# Allegro board controller.brd
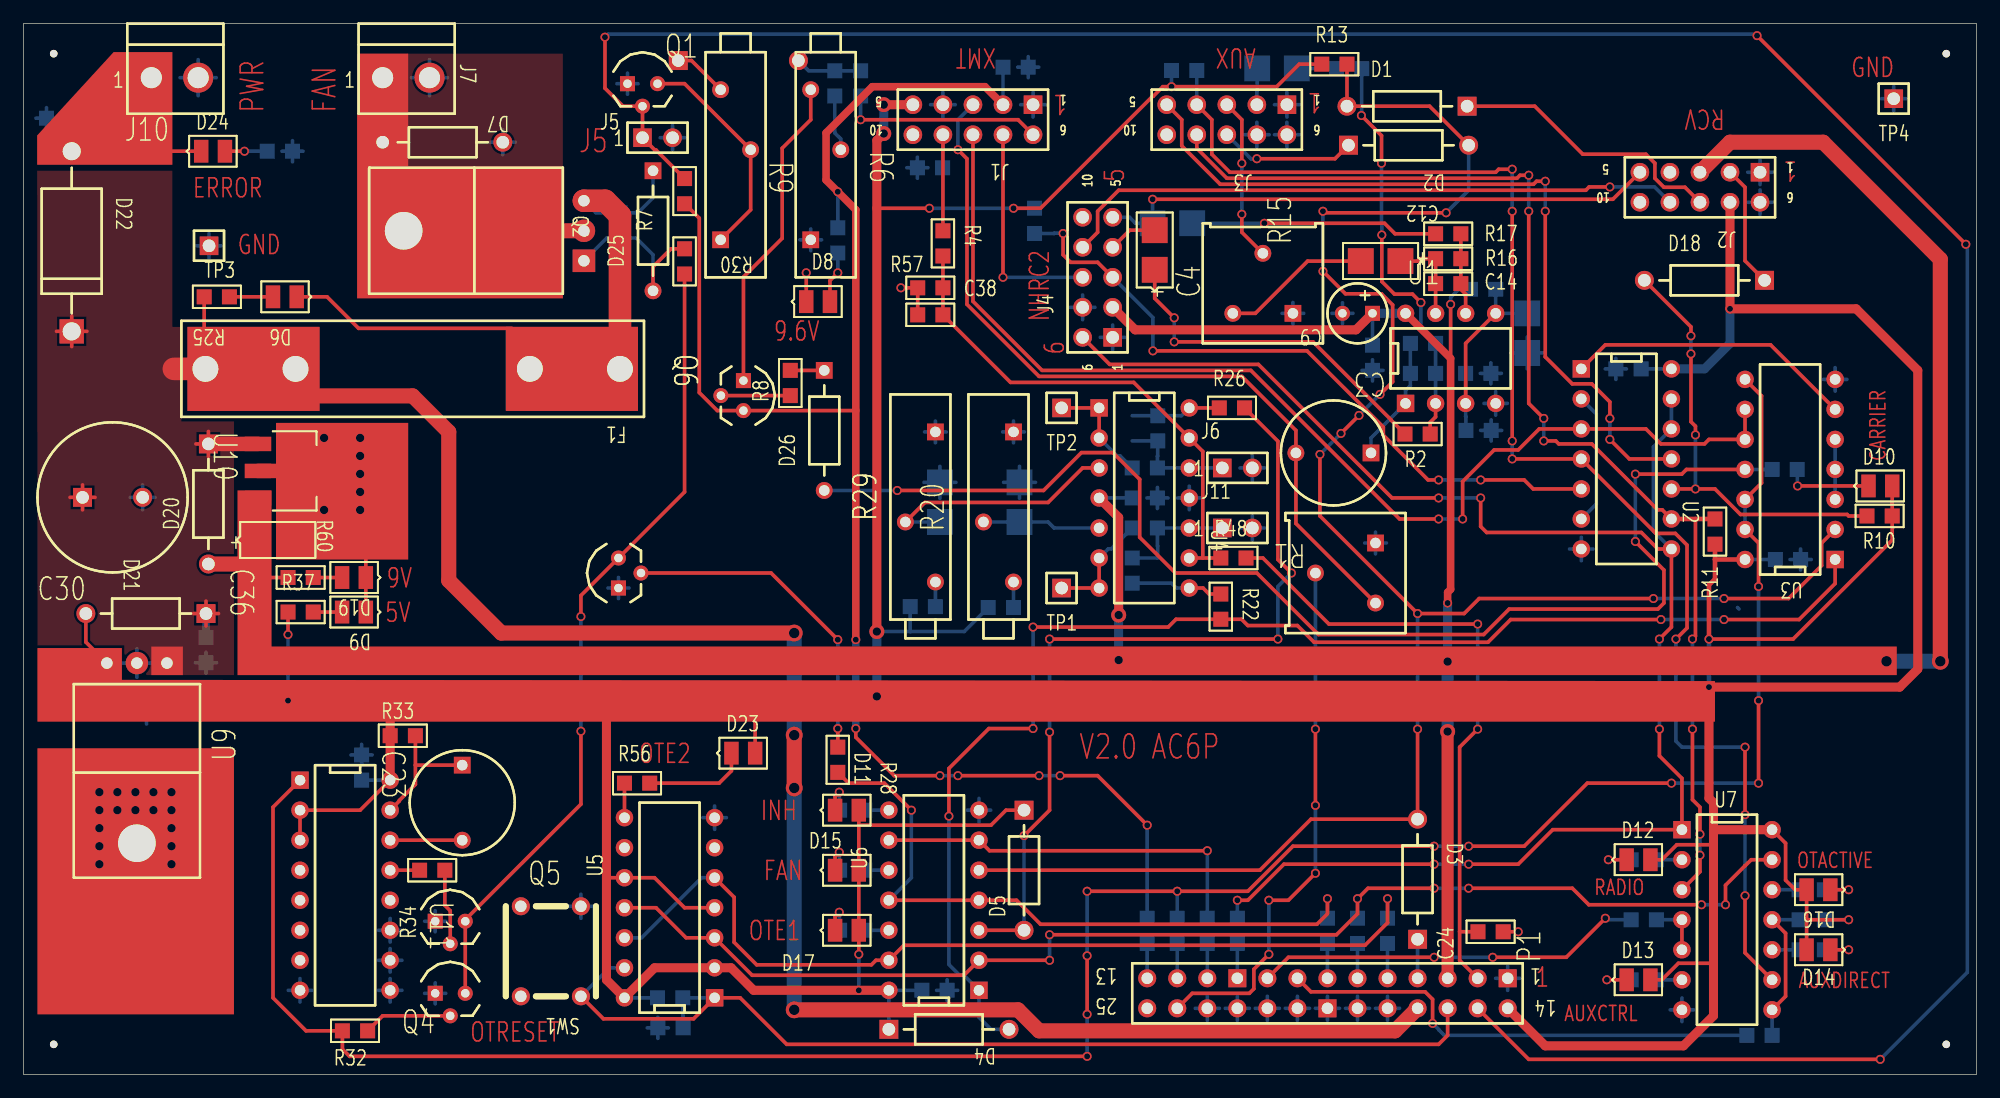
[diagram p0: board, top side]
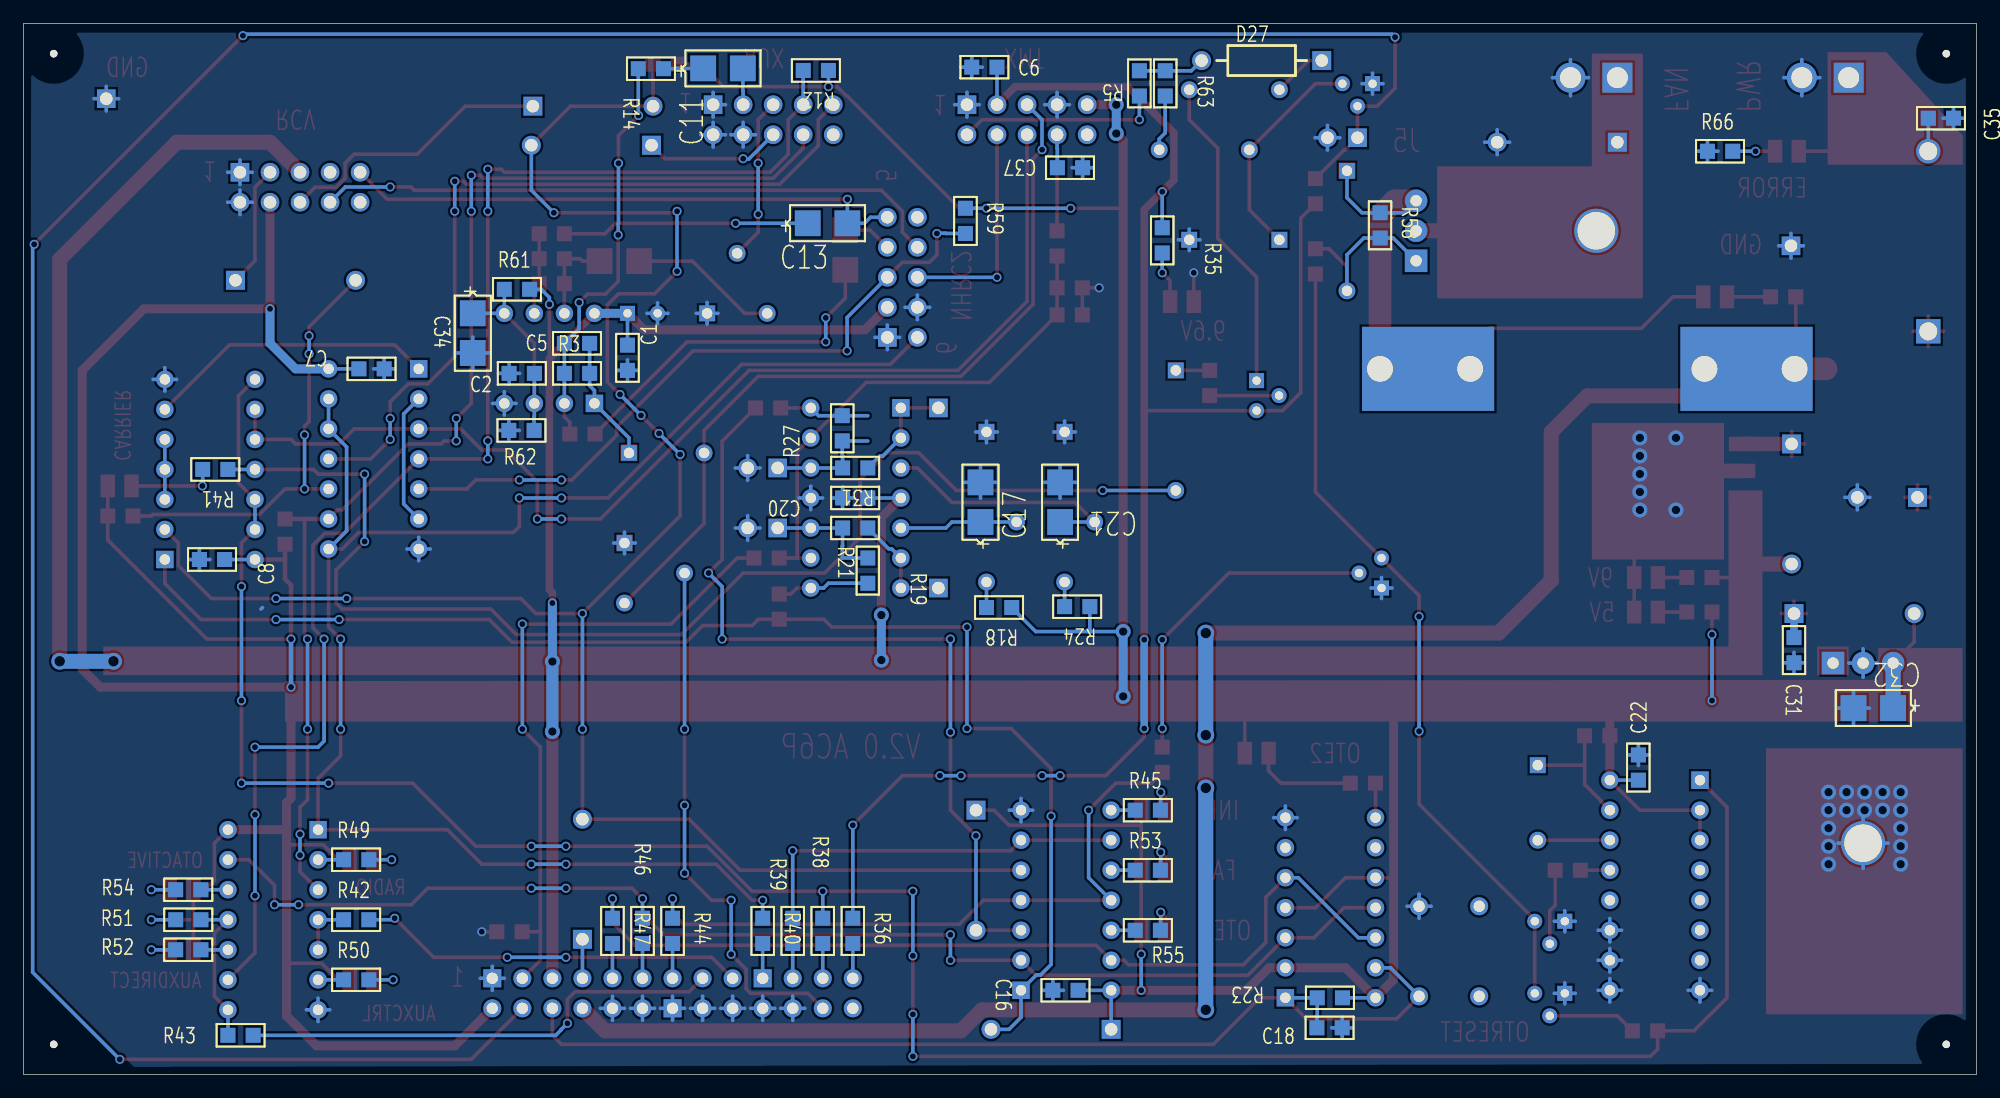
[diagram p1: board, bottom side, seen from below]

Outline 165.1 x 88.9 mm; copper layers: TOP, BOTTOM. Coordinates in mm from the lower left corner of the outline.
Outline path: 0,88.9 0,0 165.1,0 165.1,88.9 0,88.9

## Placement (name value [footprint] x y rotation side)
C1  100n  [SMC0805]  114.05 59.56 90 bottom
C2  100n  [SMC0805]  121.92 59.31 0 bottom
C3  100uF/20V Tant  [CYLD350LS250_35D]  110.74 52.58 180 top
C4  10uF/16v Tant  [EIAB_SMCT3528_12]  95.63 68.07 90 top
C5  100pF  [SMC0805]  117.25 61.85 0 bottom
C6  100n  [SMC0805]  84.94 85.22 180 bottom
C7  100n  [SMC0805]  134.62 59.69 0 bottom
C8  100n  [SMC0805]  150.24 43.56 180 bottom
C9  10uF  [C_200D_100LS_28D]  114.05 64.39 180 top
C11  10uF/16v Tant  [EIAB_SMCT3528_12]  107.65 85.12 180 bottom
C12  10uF/16v Tant  [EIAB_SMCT3528_12]  116.41 68.81 180 top
C13  10uF/16v Tant  [EIAB_SMCT3528_12]  98.81 72.01 180 bottom
C14  100pF  [SMC0805]  119.38 66.9 0 top
C16  100n  [SMC0805]  75.95 7.11 0 bottom
C17  1uF  [EIAB_SMCT3528_12]  84.2 46.74 90 bottom
C18  100n  [SMC0805]  55.75 3.94 180 bottom
C20  100n  [SMC0805]  93.73 48.77 0 bottom
C21  1uF  [EIAB_SMCT3528_12]  77.47 46.74 90 bottom
C22  100n  [SMC0805]  28.57 24.89 90 bottom
C23  100uF  [CYLD350LS250_35D]  37.08 22.99 270 top
C24  100n  [SMC0805]  125.09 12.06 180 top
C30  1000uF/35V  [CYLD500LS200_42D]  4.98 48.82 0 top
C31  470n  [SMC0805]  15.42 36.96 270 bottom
C32  1uF  [EIAB_SMCT3528_12]  7.04 30.99 0 bottom
C34  1.0uF  [EIAB_SMCT3528_12]  127.13 64.39 270 bottom
C35  100n  [SMC0805]  4.06 80.9 180 bottom
C36  22uF/Tant  [EIAB_SMCT3528_12]  19.81 45.21 0 top
C37  10p  [SMC0805]  75.56 76.71 0 bottom
C38  10nF  [SMC0805]  75.59 66.55 0 top
D1  1N5818  [DAX400_42D]  111.89 81.92 0 top
D2  1N5818  [DAX400_42D]  122.17 78.61 180 top
D3  1N5818  [DAX400_42D]  117.86 21.59 270 top
D4  1N5818  [DAX400_42D]  83.31 3.81 180 top
D5  1N5818  [DAX400_42D]  84.58 12.19 90 top
D6  RED  [SMD_0805_21]  21.08 65.79 180 top
D7  1N4002  [DAX400_42D]  40.51 78.87 180 top
D8  GRN  [SMD_0805_21]  68.17 65.38 0 top
D9  GRN  [SMD_0805_21]  26.92 39.12 180 top
D10  RED  [SMD_0805_21]  157.99 49.78 0 top
D11  BLU  [SMD_0805_21]  70.61 22.35 0 top
D12  YEL  [SMD_0805_21]  137.54 18.16 0 top
D13  YEL  [SMD_0805_21]  137.54 8 0 top
D14  YEL  [SMD_0805_21]  150.75 10.54 180 top
D15  GRN  [SMD_0805_21]  70.61 17.27 0 top
D16  RED  [SMD_0805_21]  150.75 15.62 180 top
D17  BLU  [SMD_0805_21]  70.61 12.19 0 top
D18  1N5818  [DAX400_42D]  137.03 67.18 0 top
D19  GRN  [SMD_0805_21]  26.92 42.04 180 top
D20  1N5818  [DAX400_42D]  15.62 43.18 90 top
D21  1N5818  [DAX400_42D]  5.26 38.99 0 top
D22  SB1245  [DAX600_60D]  4.06 78.11 270 top
D23  BLU  [SMD_0805_21]  61.85 27.18 0 top
D24  RED  [SMD_0805_21]  17.02 78.11 0 top
D25  1N5240B  [DAX400_35D]  53.21 66.29 90 top
D26  1N5243B  [DAX400_35D]  67.69 49.4 90 top
D27  1N5818  [DAX400_42D]  65.51 85.78 180 bottom
F1  2.5A Fast AGC Glass  [3AG_250_1250]  50.42 59.69 180 top
J1  1O-pin ribbon to DB9 female  [BCON2DB9_5X2V_100S_42D]  85.34 82.04 180 top
J2  1O-pin ribbon to DB9 female  [BCON2DB9_5X2V_100S_42D]  146.81 76.33 180 top
J3  1O-pin ribbon to DB9 female  [BCON2DB9_5X2V_100S_42D]  106.81 82.04 180 top
J4  1O-pin ribbon to DB9 male  [BCON2DB9_5X2V_100S_42D]  92.08 62.36 90 top
J5  2Pin Header  [BCON_2X1V_100S_1SQ_42D]  52.32 79.25 0 top
J6  2Pin Header  [BCON_2X1V_100S_1SQ_42D]  101.35 51.31 0 top
J7  0.156 VH  [BLKCON156_VHTM1SQ_SW156_2]  30.35 84.33 0 top
J10  0.156 VH  [BLKCON156_VHTM1SQ_SW156_2]  10.79 84.33 0 top
J11  2Pin Header  [BCON_2X1V_100S_1SQ_42D]  101.35 46.23 0 top
NOREF  -  [unnamed]  162.56 86.36 0 top
NOREF#2  -  [unnamed]  162.56 2.54 0 top
NOREF#3  -  [unnamed]  2.54 86.36 0 top
NOREF#4  -  [unnamed]  2.54 2.54 0 top
P1  26 Ribbon to DB25  [BCON2DB25_13X2V_100SW_1SQ_42D]  125.48 8.13 180 top
Q1  2N2222  [TO92R100]  52.32 83.82 0 top
Q2  IRF9Z34  [TO220_H1234]  47.37 68.83 0 top
Q3  2N2222  [TO92R100]  50.29 42.42 90 top
Q4  2N2222  [TO92R100]  36.07 6.86 0 top
Q5  2N2222  [TO92R100]  36.07 12.95 0 top
Q6  2N2907  [TO92R100]  60.86 57.43 270 top
R1  100k  [VRES18_35D]  111.76 42.42 270 top
R2  51k  [SMR0805]  116.79 54.18 0 top
R3  51k  [SMR0805]  119.38 59.31 180 bottom
R4  47k  [SMR0805]  77.72 71.37 270 top
R5  11k  [SMR0805]  70.76 82.78 90 bottom
R6  10k/10t  [VRES9_35D]  66.55 70.61 270 top
R7  9.1k  [SMR0805]  55.88 73.66 90 top
R8  1k  [SMR0805]  64.82 57.43 90 top
R9  10k/10t  [VRES9_35D]  58.93 70.61 270 top
R10  4.7k  [SMR0805]  157.99 47.24 180 top
R11  47k  [SMR0805]  143 44.86 90 top
R12  47k  [SMR0805]  97.05 84.94 0 bottom
R13  47k  [SMR0805]  109.75 85.47 0 top
R14  51k  [SMR0805]  111 85.09 0 bottom
R15  10k  [VRES18_35D]  104.78 66.93 180 top
R16  51k  [SMR0805]  121.51 69.01 180 top
R17  51k  [SMR0805]  119.38 71.12 0 top
R18  39k  [SMR0805]  81.56 39.5 0 bottom
R19  1M  [SMR0805]  93.73 43.69 270 bottom
R20  10k/10t  [VRES9_35D]  83.69 54.36 90 top
R21  6.2k  [SMR0805]  93.73 46.23 0 bottom
R22  10k  [SMR0805]  101.22 40.64 270 top
R23  1M  [SMR0805]  53.59 6.48 0 bottom
R24  39k  [SMR0805]  74.96 39.57 0 bottom
R25  330  [SMR0805]  17.4 65.79 180 top
R26  10k  [SMR0805]  101.09 56.39 0 top
R27  1M  [SMR0805]  95.89 53.59 90 bottom
R28  10k  [SMR0805]  68.83 27.69 270 top
R29  10k/10t  [VRES9_35D]  77.09 54.36 90 top
R30  2k  [SMR0805]  55.88 69.85 270 top
R31  6.2k  [SMR0805]  93.73 51.31 0 bottom
R32  10k  [SMR0805]  29.08 3.68 180 top
R33  1M  [SMR0805]  33.12 28.65 180 top
R34  10k  [SMR0805]  35.61 17.27 180 top
R35  620  [SMR0805]  68.83 71.63 270 bottom
R36  330  [SMR0805]  95 13.21 270 bottom
R37  330  [SMR0805]  22.35 39.12 0 top
R38  1k  [SMR0805]  97.54 13.21 270 bottom
R39  1k  [SMR0805]  100.08 13.21 270 bottom
R40  1k  [SMR0805]  102.62 13.21 270 bottom
R41  330  [SMR0805]  147.83 51.18 0 bottom
R42  1k  [SMR0805]  138.05 13.08 180 bottom
R43  1k  [SMR0805]  147.83 3.3 180 bottom
R44  1k  [SMR0805]  110.24 13.21 270 bottom
R45  1k  [SMR0805]  71.12 22.35 180 bottom
R46  1k  [SMR0805]  112.78 13.21 270 bottom
R47  1k  [SMR0805]  115.32 13.21 270 bottom
R48  47k  [SMR0805]  101.22 43.69 0 top
R49  330  [SMR0805]  138.05 18.16 180 bottom
R50  330  [SMR0805]  138.05 8 180 bottom
R51  10k  [SMR0805]  150.11 13.08 0 bottom
R52  330  [SMR0805]  150.11 10.54 0 bottom
R53  330  [SMR0805]  71.12 17.27 180 bottom
R54  330  [SMR0805]  150.11 15.62 0 bottom
R55  1k  [SMR0805]  71.12 12.19 180 bottom
R56  1k  [SMR0805]  50.8 24.64 0 top
R57  680k  [SMR0805]  75.59 64.26 0 top
R58  220k  [SMR0805]  50.42 72.9 270 bottom
R59  4.7k  [SMR0805]  85.47 73.28 270 bottom
R60  620  [SMR0805]  22.35 42.04 0 top
R61  10k 1%  [SMR0805]  124.46 66.42 180 bottom
R62  10k 1%  [SMR0805]  124.08 54.48 180 bottom
R63  10k  [SMR0805]  68.58 84.91 270 bottom
R66  470  [SMR0805]  22.73 78.11 180 bottom
SW1  SW PUSHBUTTON  [B3F-1000_38D]  47.12 14.22 180 top
TP1  TestPoint  [BCON_1X1V_SQ_42D]  87.76 41.15 0 top
TP2  TestPoint  [BCON_1X1V_SQ_42D]  87.76 56.39 0 top
TP3  TestPoint  [BCON_1X1V_SQ_42D]  15.67 70.1 0 top
TP4  TestPoint  [BCON_1X1V_SQ_42D]  158.12 82.55 0 top
U1  TL082  [DIP100_8_W300_L400]  116.84 56.77 0 top
U2  74HC00  [DIP100_14_W300_L700]  131.7 59.69 270 top
U3  74HC00  [DIP100_14_W300_L700]  153.16 43.56 90 top
U4  LM324  [DIP100_14_W300_L700]  90.93 56.39 270 top
U5  74HC74  [DIP100_14_W300_L700]  58.42 6.48 90 top
U6  74HC14  [DIP100_14_W300_L700]  80.77 7.11 90 top
U7  74HC05  [DIP100_14_W300_L700]  140.21 20.7 270 top
U9  7805 / TO220  [TO220_H1234]  12.12 34.8 90 top
U10  LM2940 / SOT223  LDO  [SOT223_1234]  19.81 53.34 270 top
U11  74HC123  [DIP100_16_W300_L800]  23.37 24.89 270 top

## Library data of the parts
C1 C2 C5-C8 C14 C16 C18 C20 C22 C24 C31 C35 = C NP
C3 C4 C11-C13 C17 C21 C23 C30 C32 C34 C36 = C POL
C9 = C POL: Tolerance: TOL; User Part Number: UPN
C37 C38 = C small
D1-D5 D18 D20-D22 D27 = DIODE SCHOTTKY_0
D6 D8-D17 D19 D23 D24 = LED
D7 = DIODE_2
D25 D26 = Diode Zener
F1 = FUSEHOLDER_2: Tolerance: TOL; User Part Number: UPN
J1 = CONNECTOR DB9_2
J2 J3 = CONNECTOR DB9_1
J4 = 2x10Header_1
J5 J6 J11 = 2Pin Header
J7 J10 = HEADER 2_4
P1 = CONNECTOR DB25
Q1 Q3-Q5 = 2N2222
Q2 = IRF9Z34
Q6 = 2N3906_0
R1 R6 R9 R15 R20 R29 = RPOT_4
R2 R3 R5 R7 R10-R14 R16 R17 R35-R56 R60-R63 R66 = R small_0
R4 R22 R25 R26 R28 R30 R58 = R small
R8 R18 R19 R21 R23 R24 R27 R31-R34 R57 R59 = R
SW1 = SW PUSHBUTTON_4
TP1-TP4 = TestPoint
U1 = TL082_2
U2 U3 = 74HC00_18
U4 = LM324/DIP_3
U5 = 74HC74_6
U6 = 74HC14
U7 = 74HC05_9
U9 = 78L05/TO92_5
U10 = 78L05/TO92_4
U11 = 74HC123_8

## Footprints (pads in the part's own frame, mm; a bottom-side part is the same pattern mirrored in y, then rotated)
3AG_250_1250
  round 2.769 hole 2.184: (7.62,0) (27.432,0) 1(0,0) 2(35.052,0)
B3F-1000_38D
  round 1.524 hole 0.965: (5.08,7.62) (5.08,0) 1(0,7.62) 2(0,0)
BCON2DB9_5X2V_100S_42D
  round 1.575 hole 1.067: (10.16,2.54) 2(2.54,0) 3(5.08,0) 4(7.62,0) 5(10.16,0) 6(0,2.54) 7(2.54,2.54) 8(5.08,2.54) 9(7.62,2.54)
  rect 1.575x1.575 hole 1.067: 1(0,0)
BCON2DB25_13X2V_100SW_1SQ_42D
  round 1.524 hole 0.965: (30.48,2.54) 2(2.54,0) 3(5.08,0) 4(7.62,0) 5(10.16,0) 6(12.7,0) 7(15.24,0) 8(17.78,0) 9(20.32,0) 11(25.4,0) 12(27.94,0) 13(30.48,0) 14(0,2.54) 15(2.54,2.54) 16(5.08,2.54) 17(7.62,2.54) 18(10.16,2.54) 19(12.7,2.54) 21(17.78,2.54) 22(20.32,2.54) 23(22.86,2.54) 24(25.4,2.54) 25(27.94,2.54)
  rect 1.524x1.524 hole 0.965: 1(0,0) 10(22.86,0) 20(15.24,2.54)
BCON_1X1V_SQ_42D
  rect 1.575x1.575 hole 1.067: 1(0,0)
BCON_2X1V_100S_1SQ_42D
  rect 1.575x1.575 hole 1.067: 1(0,0)
  round 1.575 hole 1.067: 2(2.54,0)
BLKCON156_VHTM1SQ_SW156_2
  rect 2.54x2.54 hole 1.778: 1(0,0)
  round 2.54 hole 1.778: 2(3.962,0)
C_200D_100LS_28D
  rect 1.27x1.27 hole 0.711: 1(0,0)
  round 1.27 hole 0.711: 2(2.54,0)
CYLD350LS250_35D
  rect 1.422x1.422 hole 0.889: 1(-3.175,0)
  round 1.422 hole 0.889: 2(3.175,0)
CYLD500LS200_42D
  rect 1.6x1.6 hole 1.067: 1(0,0)
  round 1.6 hole 1.067: 2(5.08,0)
DAX400_35D
  round 1.422 hole 0.889: 1(0,0)
  rect 1.422x1.422 hole 0.889: 2(10.16,0)
DAX400_42D
  round 1.6 hole 1.067: 1(0,0)
  rect 1.6x1.6 hole 1.067: 2(10.16,0)
DAX600_60D
  round 2.057 hole 1.524: 1(0,0)
  rect 2.057x2.057 hole 1.524: 2(15.24,0)
DIP100_8_W300_L400
  rect 1.473x1.473 hole 0.889: 1(0,0)
  round 1.473 hole 0.889: 2(2.54,0) 3(5.08,0) 4(7.62,0) 5(7.62,7.62) 6(5.08,7.62) 7(2.54,7.62) 8(0,7.62)
DIP100_14_W300_L700
  rect 1.473x1.473 hole 0.889: 1(0,0)
  round 1.473 hole 0.889: 2(2.54,0) 3(5.08,0) 4(7.62,0) 5(10.16,0) 6(12.7,0) 7(15.24,0) 8(15.24,7.62) 9(12.7,7.62) 10(10.16,7.62) 11(7.62,7.62) 12(5.08,7.62) 13(2.54,7.62) 14(0,7.62)
DIP100_16_W300_L800
  rect 1.473x1.473 hole 0.889: 1(0,0)
  round 1.473 hole 0.889: 2(2.54,0) 3(5.08,0) 4(7.62,0) 5(10.16,0) 6(12.7,0) 7(15.24,0) 8(17.78,0) 9(17.78,7.62) 10(15.24,7.62) 11(12.7,7.62) 12(10.16,7.62) 13(7.62,7.62) 14(5.08,7.62) 15(2.54,7.62) 16(0,7.62)
EIAB_SMCT3528_12
  rect 2.184x2.184 smd: 1(0,0) 2(3.353,0)
SMC0805
  rect 1.27x1.27 smd: 1(0,0) 2(2.134,0)
SMD_0805_21
  rect 1.219x1.93 smd: 1(0,0) 2(-2.007,0)
SMR0805
  rect 1.27x1.27 smd: 1(0,0) 2(2.134,0)
SOT223_1234
  rect 1.219x2.235 smd: 1(0,0) 2(2.286,0) 3(4.572,0)
  rect 3.607x2.235 smd: 4(2.286,6.198)
TO92R100
  rect 1.27x1.27 hole 0.711: 1(-1.27,0)
  round 1.27 hole 0.711: 2(0,-1.905) 3(1.27,0)
TO220_H1234
  rect 1.905x1.905 hole 0.965: 1(0,0)
  round 1.905 hole 0.965: 2(0,2.54) 3(0,5.08)
  round 3.734 hole 3.175: 4(-15.24,2.54)
unnamed
  round 0.635 hole 3.175 unplated: (0,0)
VRES9_35D
  rect 1.422x1.422 hole 0.889: 1(0,0)
  round 1.422 hole 0.889: 2(-7.62,2.54) 3(-12.7,0)
VRES18_35D
  rect 1.422x1.422 hole 0.889: 1(-2.54,2.54)
  round 1.422 hole 0.889: 2(0,-2.54) 3(2.54,2.54)

## Nets
+5V: C7.2(B) C8.2(B) C16.1(A) C22.1(A) C32.1(P) D4.2(CATHODE) D5.2(CATHODE) D10.1(ANODE) D11.1(ANODE) D12.1(ANODE) D13.1(ANODE) D14.1(ANODE) D15.1(ANODE) D16.1(ANODE) D17.1(ANODE) D21.1(ANODE) D23.1(ANODE) J1.5 J2.7 P1.14 R10.1 R11.1 R12.1 R13.1 R18.1(A) R23.1(A) R24.1(A) R33.2(B) R37.1 R51.2 R59.1(A) U2.14 U3.14 U5.2(D) U5.4(P) U5.10(P) U5.14 U6.14 U7.14 U9.3(OUT) U11.2(B) U11.3(CLR) U11.16
+9.6V: C6.2(B) J1.2 Q6.3(EMITTER) R7.1 R35.1 R36.1
+9V: C1.2(B) C9.1(P) C20.1(A) C36.1(P) D20.1(ANODE) J2.3 J4.2(02) P1.3 R60.1 R61.2 U1.8 U4.4 U10.3(OUT)
+VBUS: C35.1(A) D22.1(ANODE) D24.2(CATHODE) J10.1
GND: C1.1(A) C2.2(B) C6.1(A) C7.1(A) C8.1(A) C9.2(N) C16.2(B) C17.2(N) C18.2(B) C20.2(B) C21.2(N) C22.2(B) C24.1(A) C30.2(N) C31.2(B) C32.2(N) C34.2(N) C35.2(B) C36.2(N) C37.1(A) C38.1(A) D7.1(A) D8.2(CATHODE) D9.2(CATHODE) D19.2(CATHODE) J1.1 J1.4 J2.1 J2.6 J3.1 J3.6 J3.7 J4.1(01) J4.7(07) J5.2 J6.2 J7.2 J10.2 J11.2 P1.1 P1.18 P1.19 P1.20 P1.21 P1.22 P1.23 P1.24 Q1.1(EMITTER) Q3.1(EMITTER) Q4.1(EMITTER) Q5.1(EMITTER) R1.1 R6.1 R15.1 R20.1 R29.1 R57.1(A) R62.1 R66.1 SW1.2(B1) TP3.1 TP4.1 U1.4 U2.7 U3.7 U4.11 U5.7 U6.7 U7.7 U9.2(G1) U9.4(G2) U10.2(G1) U10.4(G2) U11.8 U11.9(A) U11.10(B) U11.11(CLR)
+CAS: J4.6(06) R40.1 U2.8(Y) U2.12(A) U2.13(B) U7.1(I)
+VDIST: C30.1(P) C31.1(A) D20.2(CATHODE) D21.2(CATHODE) D22.2(CATHODE) F1.2(B1) P1.17 R25.2 U9.1(IN) U10.1(IN)
+VREF: C2.1(A) C34.1(P) R61.1 R62.2 U1.3(IN+) U1.5(IN+)
AUDIOAUX: J3.3 R15.2
AUDIOOUTAUX: C11.2(N) J3.2
CARRIER: R32.2(B) R38.1 U3.8(Y) U3.12(A) U3.13(B) U11.1(A)
FANON: R28.2 R44.1 U6.4(O) U6.11(I)
INHIBIT: R39.1 U6.6(O) U6.9(I)
NCARRIER: D26.1(ANODE) R41.1 U3.11(Y)
NCOS: D18.2(CATHODE) J2.2
NCOSAUX: J3.5 U2.11(Y)
NHIGHPWR: J5.1 P1.15 Q1.2(BASE) R7.2
NINHIBIT: D1.1(ANODE) D2.1(ANODE) D3.1(ANODE) R13.2 U3.2(B) U6.5(I)
NINHIBIT2: D3.2(CATHODE) P1.4
NINHIBIT3: D1.2(CATHODE) J2.8
NINHIBITAUX: D2.2(CATHODE) J3.8
NOTEVENT2: R56.1 U5.8(Q\)
NOTRESET: C18.1(A) P1.16 R23.2(B) SW1.1(A1) U5.1(C) U5.13(C)
NOVERTEMP: D4.1(ANODE) R22.2 U3.1(A) U6.1(I)
NPTT: J1.8 U2.3(Y) U3.9(A) U3.10(B)
NPTTAUX: J3.9 R11.2 U2.9(A) U7.3(I)
NPTTDIRECT: J3.4 R12.2 U2.4(A) U7.9(I)
OTACTIVE: R46.1 U5.3(CLK) U5.11(CLK) U6.2(O) U7.13(I)
OTEVENT: R47.1 U5.5(Q) U5.12(D) U6.13(I)
PTTAUX: R42.1 U7.4(O) U7.5(I)
PTTDIRECT: R43.1 R51.1 U7.8(O) U7.11(I)
RXAUDIO: C13.2(N) J2.5 J4.5(05)
RXAUDIOGND: J2.9 J4.9(09)
TXAUDIO: C3.2(N) J1.3 R1.3
TXAUDIOGND: J1.7 J4.8(08)
TXAUDIOMON: P1.25 R1.2
TXPWR: J1.6 R5.1
VTEMP: C38.2(B) R4.2 R48.1 R57.2(B) U4.9(IN-) U4.13(IN-)
N14211920: C4.2(N) J4.4(04)
N14244033: D7.2(K) J7.1 Q2.2(D1) Q2.4(D2)
N14244061: D6.2(CATHODE) D25.2(CATHODE) F1.1(A1) Q2.3(S) R58.1
N14244259: R26.1 R27.2(B) U4.14(OUT)
N14244311: J6.1 R27.1(A) R31.2(B) U4.12(IN+)
N14244541: R21.1(A) TP1.1 U4.6(IN-) U4.7(OUT)
N14244623: J11.1 R19.1(A) R21.2(B) U4.10(IN+)
N14244639: R19.2(B) R22.1 U4.8(OUT)
N14244725: C17.1(P) R20.2 U4.5(IN+)
N14244741: C21.1(P) R29.2 U4.3(IN+)
N14244749: R31.1(A) TP2.1 U4.1(OUT) U4.2(IN-)
N14252664: C12.1(P) C14.1(A) R16.2 U1.7(OUT)
N14252688: C14.2(B) R16.1 R17.2 U1.6(IN-)
N14252816: C13.1(P) R17.1
N14255098: C11.1(P) R14.1
N14265903: C3.1(P) C5.1(A) R3.2 U1.1(OUT)
N14265949: C5.2(B) R2.2 R3.1 R14.2 U1.2(IN-)
N14266073: C4.1(P) R2.1
N14272852: C12.2(N) R15.3
N14274096: J4.3(03) R59.2(B) U2.5(B)
N14275270: U2.2(B) U2.6(Y)
N14298257: R34.2(B) U11.13(Q)
N14298417: C23.2(N) U11.14(CX)
N14298566: C23.1(P) R33.1(A) U11.15(RX/CX)
N14302873: R49.1 U7.2(O)
N14319796: D5.1(ANODE) R26.2 U6.3(I)
N14322346: R50.1 U7.6(O)
N14322650: R52.1 U7.10(O)
N14322935: R53.1 U6.10(O)
N14323094: R54.1 U7.12(O)
N14323150: R55.1 U6.12(O)
N14325476: R45.1 U6.8(O)
N14334954: U2.1(A) U3.6(Y)
N14335227: U3.3(Y) U3.4(A) U3.5(B)
N14337137: D18.1(ANODE) R10.2 U2.10(B)
N14345245: P1.13 R36.2
N14352827: C24.2(B) P1.2 R48.2
N14358982: P1.11 R39.2
N14359066: P1.10 R40.2
N14359070: P1.9 R42.2
N14359074: P1.8 R43.2
N14359078: P1.7 R44.2
N14359082: P1.6 R46.2
N14359092: P1.12 R38.2
N14359231: P1.5 R47.2
N14366204: Q3.2(BASE) R28.1
N14367008: D25.1(ANODE) Q2.1(G) R30.1 R58.2
N14367205: Q4.2(BASE) R32.1(A)
N14367813: Q5.2(BASE) R34.1(A)
N14427541: Q3.3(COLLECTOR) Q4.3(COLLECTOR) Q5.3(COLLECTOR) R30.2
N14546380: C37.2(B) J1.9 R4.1
N14581940: R6.2 R63.2
N14582559: Q1.3(COLLECTOR) R9.1 R9.2
N14582976: D27.1(ANODE) R5.2 R63.1
N14583161: D26.2(CATHODE) R8.2(B)
N14583174: Q6.2(BASE) R8.1(A)
N142124350: Q6.1(COLLECTOR) R6.3
N142445010: R18.2(B) R20.3
N142447670: R24.2(B) R29.3
N143026731: D12.2(CATHODE) R49.2
N143027271: D8.1(ANODE) R35.2
N143027431: D9.1(ANODE) R37.2
N143223221: D13.2(CATHODE) R50.2
N143226421: D14.2(CATHODE) R52.2
N143229471: D15.2(CATHODE) R53.2
N143231061: D16.2(CATHODE) R54.2
N143231621: D17.2(CATHODE) R55.2
N143238351: D11.2(CATHODE) R45.2
N143512661: D10.2(CATHODE) R41.2
N143678650: D6.1(ANODE) R25.1
N143868560: D19.1(ANODE) R60.2
N144199300: D24.1(ANODE) R66.2
N145748751: D23.2(CATHODE) R56.2
N145825510: D27.2(CATHODE) R9.3

Pads without a net: J2 4; U5 6 9; U11 4 5 6 7 12

## Via types
v1: diameter 0.762, hole 0.508, TOP to BOTTOM, 151 vias
v2: diameter 1.27, hole 0.711, TOP to BOTTOM, 31 vias
v3: diameter 1.422, hole 0.889, TOP to BOTTOM, 6 vias

## Routing (per net, layer and track width the routed paths; a pad name or vN(x,y) marks a point on that pad's centre or on a via; arc(x,y) is an arc through that point)
+5V: length 449.2
  TOP w0.305: U11.3 U11.2 28.45,22.35 U11.16 ; R13.1 107.85,85.47 105.94,83.57 v1(97.05,83.57) 96.32,83.57 95.5,82.75 95.45,82.75 85.98,73.28 v1(83.69,73.28) ; v1(70.61,10.16) D17.1 D15.1 70.61,21.08 ; D11.1 70.61,21.08 ; 70.61,21.08 81.79,21.08 83.06,22.35 D5.2 ; D12.1 138.51,18.16 139.78,19.43 142.88,19.43 ; D21.1 5.26,36.58 U9.3 ; 150.75,13.08 D16.1 149.78,15.62 148.97,16.43 148.97,19.56 U7.14 ; 150.75,13.08 D14.1 ; 150.75,13.08 v1(154.31,13.08) ; 30.99,30.53 30.96,30.56 ; 142.88,9.4 139.9,9.4 138.51,8 D13.1 ; D10.1 R10.1 157.99,45.21 149.61,36.83 v1(142.49,36.83) ; D23.1 61.85,30.35 ; 58.42,14.1 55.88,14.1 53.34,16.64 U5.10 49.28,16.64 ; R37.1 v1(22.35,37.21) ; v1(76.58,73.28) 72.14,73.28
  TOP w0.381: v1(142.49,36.83) 142.49,41.4 143,41.91 143,43.56 ; 143,43.56 U3.14 ; 143,43.56 R11.1
  TOP w0.762: v2(72.72,79.6) 72.14,79.02 v2(72.14,37.47) ; P1.14 128.65,2.41 140.34,2.41 142.88,4.95 142.88,20.7 ; 142.49,30.1 142.49,23.37 142.88,22.99 142.88,20.7 ; U6.14 v1(70.61,7.11) 61.72,7.11 59.82,9.02 U5.2 53.34,9.02 50.8,6.48 49.28,8 49.28,30.1 ; 30.99,30.53 R33.2 U11.16 ; J1.5 v2(72.72,82.04) ; v1(142.49,32.77) 158.62,32.77 160.15,34.29 160.15,59.56 154.94,64.77 v1(144.27,64.77) 144.27,73.79 ; U7.14 142.88,20.7
  BOTTOM w0.305: 74.96,37.47 79.53,37.47 R18.1 ; 74.96,37.47 R24.1 ; 74.96,37.47 v2(72.14,37.47) ; R59.1 v1(83.69,73.28) v1(76.58,73.28) ; D4.2 U6.14 C16.1 ; v1(22.35,37.21) v1(22.35,31.62) ; C8.2 U3.14 ; v1(70.61,10.16) v1(70.61,7.11) ; U11.16 C22.1 ; R51.2 v1(154.31,13.08) ; R12.1 v1(97.05,83.57) ; U2.14 C7.2 ; 50.8,6.48 R23.1
  BOTTOM w0.381: v1(142.49,36.83) v1(142.49,32.77)
  BOTTOM w0.762: v1(144.27,64.77) 144.27,61.85 142.11,59.69 U2.14 ; v2(72.14,37.47) v2(72.14,31.98) ; v2(72.72,79.6) v2(72.72,82.04)
  BOTTOM w1.27: U9.3 C32.1
+9.6V: length 141.6
  TOP w0.305: R7.1 55.91,73.66 57.12,72.44 57.12,57.68 58.65,56.16 Q6.3 70.36,56.16 ; v1(78.99,25.27) v1(85.85,25.27) ; v1(77.47,25.27) 73.61,25.27 70.36,28.52 v1(70.36,29.26) ; v1(95,21.08) 90.81,25.27 v1(87.63,25.27)
  TOP w0.635: J1.2 81.28,83.57 71.75,83.57 67.84,79.65 67.84,75.67 v1(68.83,74.68) 70.36,73.15 v1(70.36,36.78)
  BOTTOM w0.305: C6.2 J1.2 ; R35.1 v1(68.83,74.68) ; v1(85.85,25.27) v1(87.63,25.27) ; v1(77.47,25.27) v1(78.99,25.27) ; R36.1 v1(95,21.08)
  BOTTOM w0.635: v1(70.36,36.78) v1(70.36,29.26) ; 68.81,74.68 v1(68.83,74.68)
+9V: length 180.4
  TOP w0.305: v1(120.65,65.15) 120.65,60.58 ; R60.1 20.45,42.04
  TOP w0.635: v1(120.4,39.88) 120.4,40.78 120.65,41.04 120.65,60.58 U1.8
  TOP w0.762: v2(92.58,38.86) 92.58,47.12 U4.4 ; J4.2 93.98,62.99 112.65,62.99 C9.1
  TOP w1.016: P1.3 v2(120.4,29.01)
  TOP w1.27: D20.1 19.05,43.18 ; J2.3 144.27,78.87 152.15,78.87 162.05,68.96 v3(162.05,34.95)
  BOTTOM w0.305: R61.2 121.34,66.42 120.65,65.74 v1(120.65,65.15) ; C20.1 U4.4 ; C9.1 C1.2
  BOTTOM w0.762: C9.1 U1.8 ; v2(92.58,38.86) v2(92.58,35.05) ; v2(120.4,34.92) v1(120.4,39.88)
  BOTTOM w1.016: v2(120.4,29.01) v2(120.4,34.92)
  BOTTOM w1.27: v3(162.05,34.95) v3(157.51,34.95)
+VBUS: length 8.7
  TOP w0.305: D24.2 9.14,78.11
  BOTTOM w0.305: C35.1 D22.1
GND: length 295.7
  TOP w0.305: R57.1 C38.1 v1(74.17,66.55) ; 28.93,44.42 D19.2 D9.2 ; v1(126.36,12.06) C24.1 ; v1(66.17,67.82) 66.17,65.38
  TOP w1.219: U10.2 22.1,51.05
  BOTTOM w0.305: C16.2 78.08,8 ; C16.2 78.08,6.22 ; C16.2 78.97,7.11 ; C16.2 77.19,7.11 ; J2.1 147.86,76.33 ; J2.1 146.81,77.37 ; J2.1 146.81,75.28 ; J2.1 145.77,76.33 ; C37.1 75.56,77.6 ; C37.1 76.46,76.71 ; C37.1 74.67,76.71 ; C37.1 75.56,75.82 ; U11.10 30.99,10.65 ; U11.10 30.99,8.66 ; U11.10 31.98,9.65 ; U11.10 29.99,9.65 ; J7.2 34.32,85.85 ; J7.2 35.84,84.33 ; J7.2 32.79,84.33 ; J7.2 34.32,82.8 ; P1.1 126.49,8.13 ; P1.1 125.48,7.11 ; P1.1 124.46,8.13 ; P1.1 125.48,9.15 ; 1.93,80.01 C35.2 ; C35.2 1.93,81.79 ; C35.2 1.04,80.9 ; C35.2 2.82,80.9 ; D7.1 40.51,79.92 ; D7.1 40.51,77.81 ; D7.1 39.46,78.87 ; D7.1 41.57,78.87 ; 14.53,34.82 C31.2 ; C31.2 15.42,35.71 ; C31.2 16.31,34.82 ; C31.2 15.42,33.93 ; 10.06,47.76 C30.2 ; C30.2 10.06,49.88 ; C30.2 9,48.82 ; C30.2 11.12,48.82 ; R15.1 107.31,65.31 ; R15.1 108.23,64.39 ; R15.1 106.4,64.39 ; R15.1 107.31,63.47 ; 157.07,82.55 TP4.1 ; TP4.1 158.12,83.59 ; TP4.1 158.12,81.51 ; TP4.1 159.16,82.55 ; C6.1 84.94,86.11 ; C6.1 84.94,84.33 ; C6.1 85.83,85.22 ; C6.1 84.05,85.22 ; 127.13,59.69 C34.2 ; C34.2 125.78,61.04 ; C34.2 128.48,61.04 ; C34.2 127.13,62.38 ; U11.11 31.98,12.19 ; U11.11 29.99,12.19 ; U11.11 30.99,13.19 ; U11.11 30.99,11.2 ; Q4.1 34.8,7.75 ; Q4.1 34.8,5.97 ; Q4.1 35.69,6.86 ; Q4.1 33.91,6.86 ; 123.47,56.77 U1.4 ; U1.4 124.46,57.76 ; U1.4 125.45,56.77 ; U1.4 124.46,55.78 ; R66.1 23.62,78.11 ; R66.1 22.73,79 ; R66.1 21.84,78.11 ; R66.1 22.73,77.21 ; 102.84,46.23 J11.2 ; J11.2 103.89,45.18 ; J11.2 103.89,47.27 ; J11.2 104.93,46.23 ; 28.57,26.13 C22.2 ; C22.2 28.57,27.92 ; C22.2 27.68,27.03 ; C22.2 29.47,27.03 ; 79.78,22.35 U6.7 ; U6.7 81.77,22.35 ; U6.7 80.77,21.36 ; U6.7 80.77,23.35 ; R1.1 114.3,45.87 ; R1.1 115.22,44.96 ; R1.1 114.3,44.04 ; R1.1 113.38,44.96 ; J1.1 85.34,83.09 ; J1.1 85.34,81 ; J1.1 84.3,82.04 ; J1.1 86.39,82.04 ; 111.76,5.59 P1.19 ; P1.19 112.78,4.57 ; P1.19 113.79,5.59 ; P1.19 112.78,6.61 ; 91.03,62.36 J4.1 ; J4.1 93.12,62.36 ; J4.1 92.08,63.4 ; J4.1 92.08,61.31 ; 46.1,14.22 SW1.2 ; SW1.2 47.12,13.21 ; SW1.2 47.12,15.24 ; SW1.2 48.14,14.22 ; C1.1 114.94,59.56 ; C1.1 114.05,60.45 ; C1.1 113.15,59.56 ; C1.1 114.05,58.67 ; J3.7 104.27,80.55 ; J3.7 104.27,78.46 ; J3.7 103.22,79.5 ; J3.7 105.31,79.5 ; R29.1 78.01,54.36 ; R29.1 77.09,55.27 ; R29.1 76.17,54.36 ; R29.1 77.09,53.44 ; U3.7 154.16,58.8 ; U3.7 152.17,58.8 ; U3.7 153.16,57.81 ; U3.7 153.16,59.79 ; 146.81,73.79 146.81,74.83 ; 146.81,73.79 145.77,73.79 ; 146.81,73.79 147.86,73.79 ; 146.81,73.79 146.81,72.74 ; J3.6 106.81,80.55 ; J3.6 107.85,79.5 ; J3.6 105.76,79.5 ; J3.6 106.81,78.46 ; 114.3,5.59 P1.18 ; P1.18 115.32,4.57 ; P1.18 115.32,6.61 ; P1.18 116.33,5.59 ; 140.21,4.47 U7.7 ; U7.7 139.21,5.46 ; U7.7 141.2,5.46 ; U7.7 140.21,6.45 ; 58.42,20.72 U5.7 ; U5.7 59.41,21.72 ; U5.7 58.42,22.71 ; U5.7 57.43,21.72 ; P1.21 108.71,5.59 ; P1.21 107.7,6.61 ; P1.21 106.68,5.59 ; P1.21 107.7,4.57 ; U2.7 132.69,44.45 ; U2.7 131.7,45.44 ; U2.7 131.7,43.46 ; U2.7 130.71,44.45 ; 123.16,59.31 C2.2 ; C2.2 124.05,60.2 ; C2.2 124.95,59.31 ; C2.2 124.05,58.42 ; U9.4 11.7,19.56 ; U9.4 7.45,19.56 ; U9.4 9.58,21.68 ; U9.4 9.58,17.43 ; 104.14,5.59 P1.22 ; P1.22 105.16,6.61 ; P1.22 106.17,5.59 ; P1.22 105.16,4.57 ; 110.24,4.57 P1.20 ; P1.20 110.24,6.61 ; P1.20 109.22,5.59 ; P1.20 111.25,5.59 ; 13.23,84.33 J10.2 ; J10.2 14.76,82.8 ; J10.2 14.76,85.85 ; J10.2 16.28,84.33 ; J6.2 104.93,51.31 ; J6.2 103.89,50.26 ; J6.2 102.84,51.31 ; J6.2 103.89,52.35 ; C8.1 150.24,44.45 ; C8.1 149.35,43.56 ; C8.1 151.13,43.56 ; C8.1 150.24,42.67 ; 101.6,5.59 P1.23 ; P1.23 103.63,5.59 ; P1.23 102.62,6.61 ; P1.23 102.62,4.57 ; 97.56,48.77 U4.11 ; U4.11 98.55,47.77 ; U4.11 98.55,49.76 ; U4.11 99.55,48.77 ; 106.81,81 J3.1 ; J3.1 105.76,82.04 ; J3.1 107.85,82.04 ; J3.1 106.81,83.09 ; 124.08,53.59 R62.1 ; R62.1 124.08,55.37 ; R62.1 124.97,54.48 ; R62.1 123.19,54.48 ; R6.1 67.46,70.61 ; R6.1 65.63,70.61 ; R6.1 66.55,71.53 ; R6.1 66.55,69.7 ; R20.1 84.61,54.36 ; R20.1 83.69,55.27 ; R20.1 83.69,53.44 ; R20.1 82.78,54.36 ; C20.2 96.75,48.77 ; C20.2 95.86,49.66 ; C20.2 95.86,47.88 ; C20.2 94.97,48.77 ; 14.63,70.1 TP3.1 ; TP3.1 15.67,69.06 ; TP3.1 16.72,70.1 ; TP3.1 15.67,71.15 ; 34.8,12.06 Q5.1 ; Q5.1 35.69,12.95 ; Q5.1 33.91,12.95 ; Q5.1 34.8,13.85 ; P1.24 100.08,6.61 ; P1.24 99.06,5.59 ; P1.24 100.08,4.57 ; P1.24 101.09,5.59 ; 10.39,29.64 C32.2 ; C32.2 9.04,30.99 ; C32.2 10.39,32.34 ; C32.2 11.74,30.99 ; U11.8 23.37,8.11 ; U11.8 24.36,7.11 ; U11.8 23.37,6.12 ; U11.8 22.37,7.11 ; 50.29,40.26 Q3.1 ; Q3.1 51.18,41.15 ; Q3.1 49.4,41.15 ; Q3.1 50.29,42.04 ; 51.05,82.93 Q1.1 ; Q1.1 50.16,83.82 ; Q1.1 51.95,83.82 ; Q1.1 51.05,84.71 ; 53.62,3.05 53.62,3.94 ; 53.62,3.94 54.51,3.94 ; 53.62,3.94 53.62,4.83 ; 53.62,3.94 52.73,3.94 ; 89.53,63.85 J4.7 ; J4.7 90.58,64.9 ; J4.7 89.53,65.94 ; J4.7 88.49,64.9 ; C21.2 77.47,51.44 ; C21.2 78.82,50.09 ; C21.2 76.12,50.09 ; C21.2 77.47,48.74 ; 133.73,59.69 C7.1 ; C7.1 135.51,59.69 ; C7.1 134.62,60.58 ; C7.1 134.62,58.8 ; 111.51,63.5 C9.2 ; C9.2 110.61,64.39 ; C9.2 111.51,65.28 ; C9.2 112.4,64.39 ; 9.58,33.59 U9.2 ; U9.2 9.58,36.01 ; U9.2 10.78,34.8 ; U9.2 8.37,34.8 ; 84.2,48.74 C17.2 ; C17.2 84.2,51.44 ; C17.2 82.85,50.09 ; C17.2 85.55,50.09 ; 77.72,81 J1.4 ; J1.4 77.72,83.09 ; J1.4 76.68,82.04 ; J1.4 78.77,82.04 ; J5.2 54.86,80.29 ; J5.2 54.86,78.2 ; J5.2 55.91,79.25 ; J5.2 53.82,79.25 ; U11.9 30.99,8.11 ; U11.9 29.99,7.11 ; U11.9 31.98,7.11 ; U11.9 30.99,6.12 ; 145.03,39.37 144.91,39.5
  vias: v2(6.4,23.88) v2(6.4,22.35) v2(6.4,20.83) v2(6.4,19.3) v2(6.4,17.78) v2(7.92,23.88) v2(7.92,22.35) v2(9.45,23.88) v2(9.45,22.35) v2(10.97,23.88) v2(10.97,22.35) v2(12.5,23.88) v2(12.5,22.35) v2(12.5,20.83) v2(12.5,19.3) v2(12.5,17.78) v2(25.4,53.85) v2(25.4,47.75) v2(28.45,53.85) v2(28.45,52.32) v2(28.45,50.8) v2(28.45,49.28) v2(28.45,47.75)
+CAS: length 139.1
  TOP w0.305: v1(102.62,14.73) 103.5,14.73 106.55,17.78 v1(119.25,17.78) ; v1(122.17,17.78) 126.36,17.78 129.29,20.7 U7.1 140.21,25.04 138.3,26.95 v1(138.3,29.21) ; v1(123.19,48.77) 123.19,46.35 123.7,45.85 136.78,45.85 138.18,44.45 U2.8 139.32,37.85 v1(138.3,36.83) ; J4.6 91.82,60.07 104.39,60.07 115.7,48.77 v1(119.63,48.77)
  BOTTOM w0.305: v1(138.3,29.21) v1(138.3,36.83) ; v1(119.63,48.77) v1(123.19,48.77) ; R40.1 v1(102.62,14.73) ; U2.8 137.79,45.97 137.79,53.09 U2.12 U2.13 ; v1(122.17,17.78) v1(119.25,17.78)
+VDIST: length 171.5
  TOP w0.305: C30.1 6.04,48.82 ; C30.1 4.98,49.88 ; C30.1 4.98,47.76 ; C30.1 3.92,48.82 ; 14.56,53.34 D20.2 ; D20.2 15.62,52.28 ; D20.2 15.62,54.4 ; D22.2 4.06,64.15 ; D22.2 5.35,62.87 ; D22.2 2.78,62.87 ; D22.2 4.06,61.58 ; D21.2 15.42,40.05 ; D21.2 15.42,37.93 ; D21.2 16.47,38.99 ; D21.2 14.36,38.99 ; R25.2 15.27,62.76 15.24,62.74
  TOP w1.219: U10.1 D20.2
  TOP w1.27: 24.13,57.4 32.89,57.4 35.94,54.36 35.94,41.78 40.39,37.34 v3(65.15,37.34) ; v3(65.15,24.23) v3(65.15,28.7) ; P1.17 115.95,3.68 85.85,3.68 84.07,5.46 v3(65.15,5.46)
  TOP w1.905: 15.37,59.69 12.7,59.69
  BOTTOM w0.635: C31.1 D21.2
  BOTTOM w1.27: v3(65.15,5.46) v3(65.15,24.23) ; v3(65.15,37.34) v3(65.15,28.7)
+VREF: length 18.2
  TOP w0.305: U1.3 121.92,61.85 U1.5
  BOTTOM w0.305: C34.1 U1.5 R61.1 ; R62.2 121.95,55.65 121.92,55.68 U1.3 C2.1
AUDIOAUX: length 13.8
  TOP w0.305: v1(103,72.77) 103,71.25 104.78,69.47 ; J3.3 103,80.77 v1(103,77.09)
  BOTTOM w0.305: v1(103,77.09) v1(103,72.77)
AUDIOOUTAUX: length 3.1
  BOTTOM w0.305: J3.2 104.27,83.19 104.29,83.21 C11.2
CARRIER: length 203.8
  TOP w0.305: v1(119.25,19.3) 107.31,19.3 103.5,15.49 v1(97.54,15.49) v1(89.92,15.49) ; v1(89.92,5.08) v1(89.92,10.03) ; v1(89.92,1.52) 27.56,1.52 26.95,2.13 R32.2 23.88,3.68 21.08,6.48 21.08,22.61 U11.1 ; v1(139.32,24.64) 132.21,24.64 126.87,19.3 v1(122.17,19.3) ; v1(146.69,24.64) v1(146.69,31.62) ; U3.13 146.69,44.96 v1(146.69,41.27) ; U3.8 146.94,57.4 146.94,50.04 U3.12
  BOTTOM w0.305: v1(97.54,15.49) R38.1 ; U3.13 U3.12 ; v1(89.92,1.52) v1(89.92,5.08) ; v1(146.69,41.27) v1(146.69,31.62) ; v1(122.17,19.3) v1(119.25,19.3) ; v1(89.92,10.03) v1(89.92,15.49) ; v1(139.32,24.64) v1(146.69,24.64)
FANON: length 57.2
  TOP w0.305: v1(110.24,14.86) 110.24,13.59 109.35,12.7 85.98,12.7 83.95,14.73 U6.4 U6.11 ; v1(75.06,22.35) 72.77,24.64 69.75,24.64 R28.2
  BOTTOM w0.305: R44.1 v1(110.24,14.86) ; U6.11 75.06,16.64 v1(75.06,22.35)
INHIBIT: length 33
  TOP w0.305: v1(100.08,18.92) 81.66,18.92 U6.6 U6.9
  BOTTOM w0.305: R39.1 v1(100.08,18.92)
NCARRIER: length 106.3
  TOP w0.305: v1(73.86,49.4) 86.23,49.4 89.43,52.6 92.1,52.6 94.36,50.34 94.36,45.44 97.38,42.42 104.27,42.42 109.47,37.21 123.44,37.21 125.6,39.37 138.18,39.37 138.68,39.88 138.68,42.67 v1(136.27,45.09) ; U3.11 140.59,51.18 140.19,50.78 v1(136.27,50.78)
  BOTTOM w0.305: U3.11 R41.1 ; v1(136.27,50.78) v1(136.27,45.09) ; D26.1 v1(73.86,49.4)
NCOS: length 10.4
  TOP w0.305: D18.2 145.54,68.83 145.54,75.06 J2.2
NCOSAUX: length 67.2
  TOP w0.305: J3.5 97.92,80.77 97.92,78.56 101.17,75.31 127.66,75.31 127.91,75.56 v1(128.65,75.56) ; U2.11 135.76,52.07 v1(134.11,53.72) ; v1(134.11,55.5) 134.11,56.9 132.59,58.42 130.94,58.42 128.65,60.71 v1(128.65,73.03)
  BOTTOM w0.305: v1(134.11,53.72) v1(134.11,55.5) ; v1(128.65,73.03) v1(128.65,75.56)
NHIGHPWR: length 246.2
  TOP w0.305: R7.2 53.46,78.21 53.36,78.21 J5.1 52.32,81.92 50.67,81.92 49.15,83.44 v1(49.15,87.76) ; P1.15 127.25,1.27 v1(156.97,1.27) ; v1(164.21,70.23) v1(146.56,87.88)
  BOTTOM w0.305: v1(156.97,1.27) 164.34,8.64 164.34,70.1 v1(164.21,70.23) ; v1(146.56,87.88) 146.43,88.01 49.4,88.01 v1(49.15,87.76)
NINHIBIT: length 172
  TOP w0.305: U6.5 104.52,17.27 108.84,21.59 D3.1 v1(117.86,29.21) ; v1(109.86,67.94) 111.76,66.04 114.81,66.04 115.75,65.1 115.75,58.6 v1(114.68,57.53) ; v1(120.27,72.9) 109.98,72.9 v1(109.86,73.03) ; v1(112.9,55.75) v1(111.38,54.23) ; D2.1 118.87,81.92 D1.1 R13.2 ; U3.2 152.02,44.96 152.02,43.05 149.22,40.26 v1(143.76,40.26) ; v1(137.79,40.26) 123.06,40.26 121.79,38.99 v1(117.86,38.99) 109.6,47.24 v1(109.6,52.45)
  BOTTOM w0.305: v1(114.68,57.53) v1(112.9,55.75) ; D2.1 122.17,74.8 v1(120.27,72.9) ; v1(109.86,73.03) v1(109.86,67.94) ; v1(117.86,38.99) v1(117.86,29.21) ; v1(111.38,54.23) v1(109.6,52.45) ; v1(137.79,40.26) v1(143.76,40.26)
NINHIBIT2: length 3.3
  BOTTOM w0.305: P1.4 D3.2
NINHIBIT3: length 23.8
  TOP w0.305: D1.2 127.76,81.92 131.83,77.85 137.16,77.85 137.92,77.09 137.92,75.82 138.68,75.06 140.46,75.06 141.73,73.79
NINHIBITAUX: length 11.6
  TOP w0.305: D2.2 110.87,77.47 v1(104.27,77.47)
  BOTTOM w0.305: J3.8 103.8,77.43 104.23,77.43 v1(104.27,77.47)
NOTEVENT2: length 2.9
  TOP w0.305: R56.1 U5.8
NOTRESET: length 89
  TOP w0.305: P1.16 120.4,3.3 119.63,2.54 64.52,2.54 60.58,6.48 U5.1 56.64,4.7 49.02,4.7 SW1.1
  BOTTOM w0.305: C18.1 55.75,4.93 55.73,4.95 R23.2 U5.1 ; U5.13 49.53,9.02 SW1.1
NOVERTEMP: length 115.4
  TOP w0.305: v1(138.43,38.48) 125.73,38.48 123.81,36.56 109.11,36.56 107.7,37.97 103.5,37.97 102.97,38.51 R22.2 97.43,38.51 96.77,37.85 v1(85.34,37.85) ; v1(78.23,21.84) 78.23,25.88 81.61,29.26 v1(85.34,29.26) ; v1(143.76,38.48) 150.11,38.48 153.16,41.53 U3.1
  BOTTOM w0.305: v1(85.34,37.85) v1(85.34,29.26) ; D4.1 81.79,3.81 80.77,4.83 U6.1 79.47,8.41 79.12,8.41 78.23,9.3 v1(78.23,21.84) ; v1(143.76,38.48) v1(138.43,38.48)
NPTT: length 95.2
  TOP w0.305: J1.8 80.26,65.41 86.11,59.56 103.76,59.56 116.33,46.99 v1(119.63,46.99) ; U3.9 U3.10 142.49,53.72 142.11,53.34 138.43,53.34 137.16,54.61 U2.3 128.14,54.61 126.36,52.83 124.33,52.83 121.67,50.16 v1(121.67,46.99)
  BOTTOM w0.305: v1(119.63,46.99) v1(121.67,46.99)
NPTTAUX: length 103
  TOP w0.305: v1(128.52,55.5) 127.25,56.77 v1(127.25,73.03) ; v1(127.25,76.07) 126.52,76.07 126.26,75.82 101.73,75.82 99.19,78.36 J3.9 ; v1(141.73,20.32) 141.73,22.61 141.1,23.24 v1(141.1,29.21) ; 141.35,46.99 141.35,37.08 v1(141.1,36.83) ; U2.9 138.54,47.76 138.16,47.76 132.59,53.34 129.79,53.34 129.54,53.59 v1(128.52,53.59) ; U7.3 141.73,17.14 v1(141.73,18.54)
  TOP w0.381: U2.9 R11.2
  BOTTOM w0.305: v1(127.25,76.07) v1(127.25,73.03) ; v1(141.1,29.21) v1(141.1,36.83) ; v1(141.73,20.32) v1(141.73,18.54) ; v1(128.52,53.59) v1(128.52,55.5)
NPTTDIRECT: length 119.7
  TOP w0.305: v1(125.86,76.58) 124.71,76.58 124.46,76.33 101.98,76.33 100.46,77.85 100.46,80.77 J3.4 ; v1(125.86,52.07) U2.4 138,45.77 139.65,45.77 140.64,44.78 140.64,37.77 v1(139.7,36.83) ; v1(145.54,15.11) 145.54,10.29 147.83,8 ; v1(145.54,27.69) v1(145.54,21.97) ; v1(125.86,53.59) v1(125.86,73.03)
  BOTTOM w0.305: v1(125.86,52.07) v1(125.86,53.59) ; v1(125.86,73.03) v1(125.86,76.58) ; J3.4 R12.2 ; v1(145.54,27.69) 140.21,27.69 139.7,28.19 v1(139.7,36.83) ; v1(145.54,15.11) v1(145.54,21.97)
OTACTIVE: length 109.2
  TOP w0.305: v1(141.86,14.35) 132.33,14.35 130.94,15.75 v1(122.17,15.75) ; v1(119.25,15.75) 113.67,15.75 v1(112.78,14.86) 112.78,13.59 111,11.81 v1(86.74,11.81) ; U7.13 146.07,18.16 145.56,17.65 145.54,17.65 143.89,16 v1(143.89,14.35) ; v1(86.74,9.65) U6.2 79.5,8.38 61.59,8.38 U5.3 56.01,11.56 53.47,14.1 50.8,14.1
  BOTTOM w0.305: v1(143.89,14.35) v1(141.86,14.35) ; R46.1 v1(112.78,14.86) ; v1(86.74,9.65) v1(86.74,11.81) ; v1(122.17,15.75) v1(119.25,15.75)
OTEVENT: length 77.1
  TOP w0.305: v1(115.32,14.86) 115.32,12.83 113.41,10.92 74.42,10.92 U6.13 72.06,9.65 71.68,9.27 61.98,9.27 60.07,11.18 60.07,14.99 U5.5
  BOTTOM w0.305: U5.12 52.25,11.56 57.33,16.64 U5.5 ; R47.1 v1(115.32,14.86)
PTTAUX: length 4.7
  TOP w0.305: U7.4 U7.5
  BOTTOM w0.305: R42.1 U7.4
PTTDIRECT: length 13
  TOP w0.305: U7.11 148.97,11.94 148.97,6.6 147.83,5.46
  BOTTOM w0.305: R43.1 147.83,5.46 ; U7.11 R51.1
RXAUDIO: length 47.8
  TOP w0.305: J2.5 134.37,74.04 v1(95.45,74.04)
  BOTTOM w0.305: v1(95.45,74.04) C13.2 94.01,72.01 93.5,72.52 J4.5
RXAUDIOGND: length 53.3
  TOP w0.305: v1(134.11,75.08) 132.36,75.08 132.08,74.8 92.58,74.8 90.81,73.03 90.81,71.25 J4.9
  BOTTOM w0.305: 139.19,73.79 137.9,75.08 v1(134.11,75.08)
TXAUDIO: length 67.4
  TOP w0.305: v1(78.99,78.23) 79.76,77.47 79.76,65.15 85.85,59.05 103,59.05 107.57,54.48 C3.2 107.57,46.61 R1.3
  BOTTOM w0.305: J1.3 78.99,80.77 v1(78.99,78.23)
TXAUDIOGND: length 18.8
  TOP w0.305: v1(82.8,67.44) J1.7
  BOTTOM w0.305: J4.8 v1(82.8,67.44)
TXAUDIOMON: length 45.5
  TOP w0.305: v1(109.22,17.02) 106.93,14.73 v1(105.28,14.73) ; v1(109.22,22.76) v1(109.22,29.21) ; P1.25 98.81,6.86 103.63,6.86 104.01,7.24 104.01,8.89 v1(105.28,10.16)
  BOTTOM w0.305: R1.2 v1(109.22,29.21) ; v1(109.22,17.02) v1(109.22,22.76) ; v1(105.28,10.16) v1(105.28,14.73)
TXPWR: length 17.1
  TOP w0.305: v1(70.76,80.77) 84.07,80.77 J1.6
  BOTTOM w0.305: R5.1 v1(70.76,80.77)
VTEMP: length 43.4
  TOP w0.305: 99.69,43.69 U4.9 ; 99.69,43.69 R48.1 ; 99.69,43.69 99.69,52.7 U4.13 93.85,58.55 83.44,58.55 R57.2 C38.2 R4.2
N14211920: length 4.2
  TOP w0.305: C4.2 93.52,71.42 J4.4
N14244033: length 3.7
  TOP w1.27: Q2.2 43.69,71.37
N14244061: length 44.9
  TOP w0.305: 41.27,63.12 28.32,63.12 25.65,65.79 D6.2
  TOP w1.905: F1.1 50.42,72.66 49.16,73.91 Q2.3
  BOTTOM w0.305: Q2.3 48.39,72.9 R58.1 51.94,72.9 53.21,74.17 D25.2
N14244259: length 7.6
  TOP w0.305: R26.1 U4.14
  BOTTOM w0.305: U4.14 97.89,55.73 R27.2 93.73,55.73
N14244311: length 9.9
  BOTTOM w0.305: J6.1 U4.12 R31.2 95.86,52.3 95.89,52.32 R27.1 93.73,53.59
N14244541: length 9.6
  TOP w0.305: U4.6 U4.7 TP1.1
  BOTTOM w0.305: R21.1 91.96,44.46 91.71,44.46 U4.6
N14244623: length 10.2
  BOTTOM w0.305: J11.1 U4.10 R21.2 95.86,44.7 95.89,44.68 95.89,43.69 R19.1
N14244639: length 7.9
  TOP w0.305: R22.1 100.23,40.64 99.72,41.15 U4.8
  BOTTOM w0.305: U4.8 97.46,41.15 97.05,41.55 R19.2
N14244725: length 10
  BOTTOM w0.305: R20.2 C17.1 86.61,46.74 87.12,46.23 U4.5
N14244741: length 21.2
  TOP w0.305: R29.2 76.2,48.39 86.61,48.39 89.53,51.31 U4.3
  BOTTOM w0.305: R29.2 C21.1
N14244749: length 9.6
  TOP w0.305: U4.2 U4.1 TP2.1
  BOTTOM w0.305: U4.2 92.46,52.32 92.71,52.32 R31.1
N14252664: length 7.7
  TOP w0.305: U1.7 C14.1 R16.2 118.06,69.01 117.86,68.81 C12.1
N14252688: length 6.9
  TOP w0.305: R17.2 R16.1 C14.2 121.51,66.42 121.92,66.01 U1.6
N14252816: length 21
  TOP w0.305: 119.41,71.12 R17.1 115.95,71.12 115.06,72.01 v1(104.9,72.01)
  BOTTOM w0.305: C13.1 v1(104.9,72.01)
N14255098: length 3.4
  BOTTOM w0.305: R14.1 110.01,85.09 109.98,85.12 C11.1
N14265903: length 10.6
  BOTTOM w0.305: C5.1 R3.2 117.25,58.27 116.84,57.86 U1.1 113.92,53.85 C3.1
N14265949: length 34.6
  TOP w0.305: v1(114.83,71.02) 114.83,67.08 115.9,66.01 117.42,66.01 v1(118.14,65.3) ; v1(114.81,77.09) 114.81,79.43 v1(113.11,81.13) ; R2.2 118.92,55.17 119.38,55.63 U1.2
  BOTTOM w0.305: R14.2 113.13,81.15 v1(113.11,81.13) ; U1.2 R3.1 C5.2 118.14,63.09 v1(118.14,65.3) ; v1(114.83,71.02) 114.83,71.96 114.81,71.98 v1(114.81,77.09)
N14266073: length 29.5
  TOP w0.305: R2.1 115.6,55.37 115.6,55.39 109.02,61.98 v1(97.28,61.98) ; C4.1 95.63,65.66 v1(97.28,64.01)
  BOTTOM w0.305: v1(97.28,64.01) v1(97.28,61.98)
N14272852: length 12.7
  TOP w0.305: C12.2 108.56,68.81 104.14,64.39 R15.3
N14274096: length 58.3
  TOP w0.305: U2.5 127.64,49.53 126.87,50.29 v1(123.19,50.29) ; v1(87.88,71.15) 87.88,69.34 88.52,68.71 90.81,68.71 J4.3 ; v1(95.48,61.21) 108.51,61.21 114.96,54.76 114.96,54.08 118.75,50.29 v1(119.63,50.29)
  BOTTOM w0.305: R59.2 87.12,71.15 87.15,71.17 87.86,71.17 v1(87.88,71.15) ; v1(123.19,50.29) v1(119.63,50.29) ; J4.3 95.48,64.03 v1(95.48,61.21)
N14275270: length 11.2
  BOTTOM w0.305: U2.2 132.97,55.88 132.97,48.26 U2.6
N14298257: length 2.5
  TOP w0.305: U11.13 R34.2
N14298417: length 6.1
  TOP w0.305: U11.14 C23.2
N14298566: length 11.1
  TOP w0.305: 33.12,26.16 33.12,24.54 31.76,23.18 31.76,23.13 U11.15 ; 33.12,26.16 R33.1 ; 33.12,26.16 C23.1
N14302873: length 2.2
  BOTTOM w0.305: U7.2 R49.1
N14319796: length 70.3
  TOP w0.305: v1(107.19,42.42) 106.05,43.56 106.05,53.57 R26.2 ; U6.3 D5.1 ; v1(84.58,20.19) 86.74,22.35 v1(86.74,28.96) ; v1(106.05,36.83) v1(86.74,36.83)
  BOTTOM w0.305: v1(106.05,36.83) 106.05,41.27 v1(107.19,42.42) ; D5.1 v1(84.58,20.19) ; v1(86.74,28.96) v1(86.74,36.83)
N14322346: length 2.2
  BOTTOM w0.305: 140.21,8 R50.1
N14322650: length 2.3
  BOTTOM w0.305: U7.10 R52.1
N14322935: length 2
  BOTTOM w0.305: R53.1 U6.10
N14323094: length 2.3
  BOTTOM w0.305: U7.12 R54.1
N14323150: length 2
  BOTTOM w0.305: R55.1 U6.12
N14325476: length 2
  BOTTOM w0.305: R45.1 U6.8
N14334954: length 24.6
  TOP w0.305: U3.6 147.7,61.72 133.73,61.72 U2.1
N14335227: length 5.1
  BOTTOM w0.305: U3.5 U3.4 U3.3
N14337137: length 36.9
  TOP w0.305: v1(141.35,54.1) 141.35,54.84 140.97,55.22 v1(140.97,60.96) ; U2.10 v1(141.35,49.53) 143,49.53 145.16,47.37 154.18,47.37 154.31,47.24 R10.2 ; D18.1 140.97,63.25 v1(140.97,62.48)
  BOTTOM w0.305: v1(141.35,54.1) v1(141.35,49.53) ; v1(140.97,62.48) v1(140.97,60.96)
N14345245: length 2.9
  BOTTOM w0.305: P1.13 R36.2
N14352827: length 54.7
  TOP w0.305: P1.2 121.41,9.65 121.41,12.06 ; R48.2 104.78,43.69 110.36,38.1 v1(122.94,38.1) ; 121.41,12.06 121.41,27.69 v1(122.94,29.21) ; 121.41,12.06 C24.2
  BOTTOM w0.305: v1(122.94,29.21) v1(122.94,38.1)
N14358982: length 2.9
  BOTTOM w0.305: P1.11 R39.2
N14359066: length 2.9
  BOTTOM w0.305: P1.10 R40.2
N14359070: length 32.9
  TOP w0.305: v1(119.25,9.91) 106.93,9.91 P1.9 ; v1(133.73,13.21) 130.43,9.91 v1(124.21,9.91)
  BOTTOM w0.305: R42.2 133.86,13.08 v1(133.73,13.21) ; v1(124.21,9.91) v1(119.25,9.91)
N14359074: length 41.2
  TOP w0.305: v1(119.13,4.32) 119.13,6.35 118.49,6.99 108.84,6.99 P1.8
  BOTTOM w0.305: R43.2 120.12,3.3 119.65,3.77 119.65,3.79 v1(119.13,4.32)
N14359078: length 2.9
  BOTTOM w0.305: P1.7 R44.2
N14359082: length 2.9
  BOTTOM w0.305: P1.6 R46.2
N14359092: length 2.9
  BOTTOM w0.305: P1.12 R38.2
N14359231: length 2.9
  BOTTOM w0.305: P1.5 R47.2
N14366204: length 28.1
  TOP w0.305: Q3.2 63.2,42.42 v1(68.83,36.78) ; R28.1 v1(68.83,29.26)
  BOTTOM w0.305: v1(68.83,36.78) v1(68.83,29.26)
N14367008: length 15.6
  TOP w0.305: R30.1 54.74,69.85 53.21,68.33 D25.1
  BOTTOM w0.305: Q2.1 49.3,70.76 R58.2 51.79,70.76 53.21,69.34 D25.1
N14367205: length 7.5
  TOP w0.305: Q4.2 30.35,4.95 R32.1
N14367813: length 6.4
  TOP w0.305: R34.1 35.61,14.3 36.07,13.84 36.07,11.05
N14427541: length 68.5
  TOP w0.305: Q4.3 Q5.3 37.34,13.08 47.12,22.86 v1(47.12,29.03) ; R30.2 55.88,49.28 Q3.3 47.12,40.51 v1(47.12,38.73)
  BOTTOM w0.305: v1(47.12,38.73) v1(47.12,29.03)
N14546380: length 10.9
  TOP w0.305: R4.1 J1.9
  BOTTOM w0.305: C37.2 77.7,78.33 77.72,78.36 J1.9
N14581940: length 4.8
  BOTTOM w0.305: R63.2 68.58,79.65 69.09,79.15 R6.2
N14582559: length 18.9
  TOP w0.305: Q1.3 55.88,83.82 R9.2 61.47,73.15 R9.1
N14582976: length 5.6
  BOTTOM w0.305: R5.2 R63.1 66.37,84.91 D27.1
N14583161: length 2.9
  TOP w0.305: R8.2 D26.2
N14583174: length 5.9
  TOP w0.305: R8.1 Q6.2
N142124350: length 27
  TOP w0.305: R6.3 66.55,80.77 64.14,78.36 64.14,70.74 60.86,67.46 Q6.1 60.86,58.67
N142445010: length 2.2
  BOTTOM w0.305: R20.3 R18.2
N142447670: length 2.1
  BOTTOM w0.305: R29.3 R24.2
N143026731: length 3.5
  TOP w0.305: v1(133.99,18.16) D12.2
  BOTTOM w0.305: R49.2 v1(133.99,18.16)
N143027271: length 4.4
  TOP w0.305: D8.1 68.17,67.16 v1(68.83,67.82)
  BOTTOM w0.305: R35.2 v1(68.83,67.82)
N143027431: length 2.4
  TOP w0.305: R37.2 D9.1
N143223221: length 3.7
  TOP w0.305: v1(133.86,8) D13.2
  BOTTOM w0.305: R50.2 v1(133.86,8)
N143226421: length 3.6
  TOP w0.305: D14.2 v1(154.31,10.54)
  BOTTOM w0.305: v1(154.31,10.54) R52.2
N143229471: length 3.2
  TOP w0.305: D15.2 68.61,18.44 v1(68.96,18.8)
  BOTTOM w0.305: v1(68.96,18.8) 68.96,17.3 R53.2
N143231061: length 3.6
  TOP w0.305: D16.2 v1(154.31,15.62)
  BOTTOM w0.305: v1(154.31,15.62) R54.2
N143231621: length 3.2
  TOP w0.305: v1(68.96,13.72) 68.61,13.36 D17.2
  BOTTOM w0.305: v1(68.96,13.72) 68.96,12.22 R55.2
N143238351: length 3.2
  TOP w0.305: D11.2 68.61,23.52 v1(68.96,23.88)
  BOTTOM w0.305: R45.2 68.96,22.38 v1(68.96,23.88)
N143512661: length 7.4
  TOP w0.305: v1(149.99,49.78) D10.2
  BOTTOM w0.305: R41.2 149.96,49.81 v1(149.99,49.78)
N143678650: length 3.7
  TOP w0.305: R25.1 D6.1
N143868560: length 2.4
  TOP w0.305: D19.1 R60.2
N144199300: length 3.6
  TOP w0.305: D24.1 v1(18.67,78.11)
  BOTTOM w0.305: v1(18.67,78.11) R66.2
N145748751: length 8.8
  TOP w0.305: D23.2 59.84,25.68 58.8,24.64 R56.2
N145825510: length 4.6
  TOP w0.305: D27.2 56.46,85.78 R9.3

## Copper pours and planes (outline as drawn; the poured copper is in the pictures)
+5V on TOP (solid shape): 8.31,33.38 143,33.27 143,29.84 53.47,29.84 1.17,29.85 1.17,36.07 8.31,36.07
+9V on TOP (solid shape): 20.95,36.2 158.37,36.2 158.37,33.78 18.08,33.78 18.08,49.4 20.95,49.4
+VBUS on TOP (solid shape): 12.57,76.96 1.14,76.96 1.14,79.44 7.61,86.49 12.57,86.49
GND on TOP (solid shape): 17.78,5.08 1.17,5.08 1.17,27.58 17.78,27.58
GND on TOP (solid shape): 32.51,43.56 21.34,43.56 21.34,55.12 32.51,55.12
GND on BOTTOM: 0.89,88.14 0.89,0.89 155.79,0.64 164.59,9.4 164.47,88.14
+VDIST on TOP (solid shape): 13.46,33.78 10.79,33.78 10.79,36.2 13.46,36.2
+VDIST on TOP (solid shape): 25.02,56.13 13.84,56.13 13.84,63.25 25.02,63.25
+VDIST on BOTTOM (solid shape): 25.02,56.13 13.84,56.13 13.84,63.25 25.02,63.25
+VDIST on TOP: 1.14,76.45 1.17,36.3 8.51,36.3 8.5,33.78 17.78,33.78 17.78,55.24 13.34,55.24 13.34,63.25 12.57,63.25 12.57,76.45
N14244033 on TOP (solid shape): 32.51,76.83 45.59,76.83 45.59,65.66 28.19,65.66 28.19,86.36 32.51,86.36
N14244033 on TOP: 32.38,86.36 32.38,76.71 45.59,76.71 45.59,86.36
N14244061 on TOP (solid shape): 51.94,56.13 40.77,56.13 40.77,63.25 51.94,63.25
N14244061 on BOTTOM (solid shape): 51.94,56.13 40.77,56.13 40.77,63.25 51.94,63.25

## Text on the board
BOTTOM: BOTTOM
Board Geometry/Soldermask Bottom: SMB
Ref Des/Silkscreen Bottom: SSB
TOP: AUXCTRL | RADIO | OTACTIVE | AUXDIRECT | CARRIER | ERROR | GND | 5V | 9V | OTRESET | OTE2 | OTE1 | INH | FAN | 9.6V | 1 | NHRC2 | 6 | 5 | XMT | AUX | RCV | TOP | J5 | PWR | V2.0 AC6P
Board Geometry/Soldermask Top: SMT
Ref Des/Silkscreen Top: SST
COMPVAL_TYPE_BOTTOM: FIGURE | SIZE | 20.0 | 28.0 | 35.0 | 38.0 | 42.0 | 70.0 | 86.0 | 125.0 | DRILL CHART: TOP to BOTTOM | ALL UNITS ARE IN MILS | PLATED | NON-PLATED | QTY | 193 | 12 | 2 | 162 | 39 | 59 | 4 | 3
User.6: MECH
